# Altium PCB Flyback-Converter_pcb.PcbDoc
Units mm, origin at the board's own origin, x right, y up, seen from the top; angles counter-clockwise.
Board outline 75 x 23 mm, 2 copper layers (Top Layer, Bottom Layer), stack 0.4 mm thick; 16 components, 11 nets, 49 pads, 0 vias.
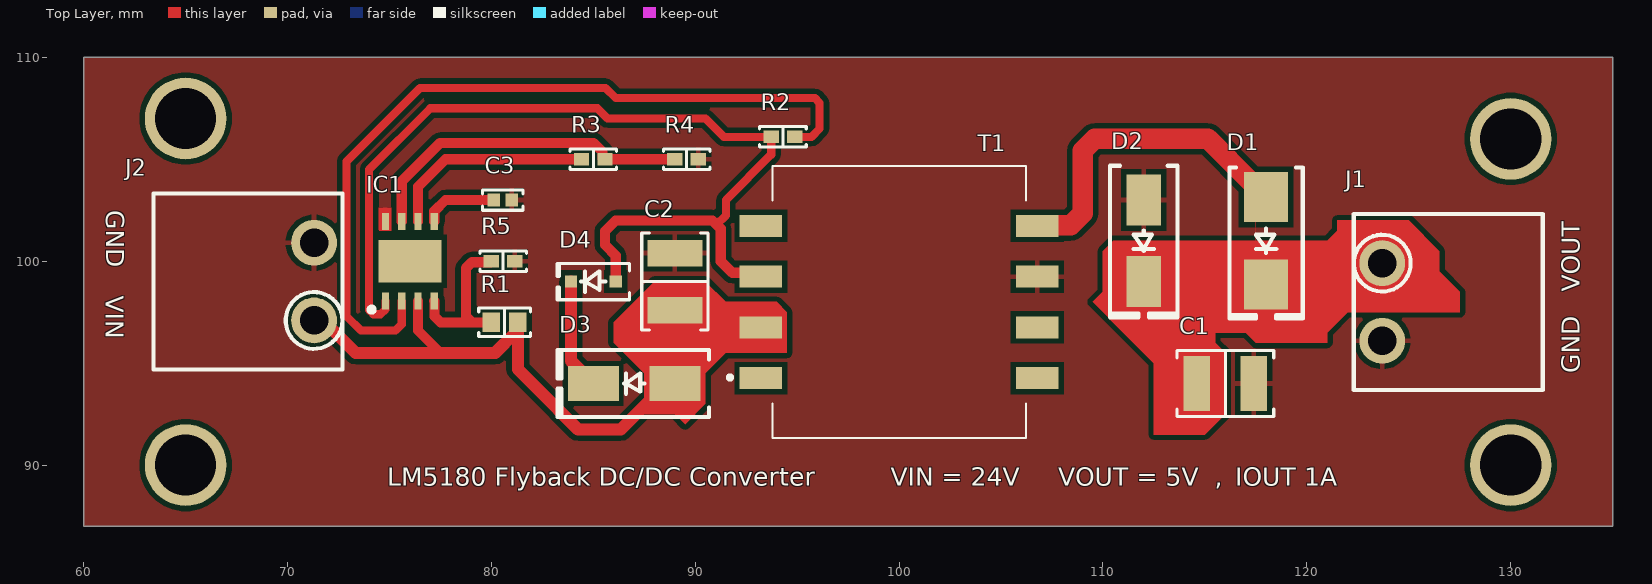
[diagram p0: Top Layer view]
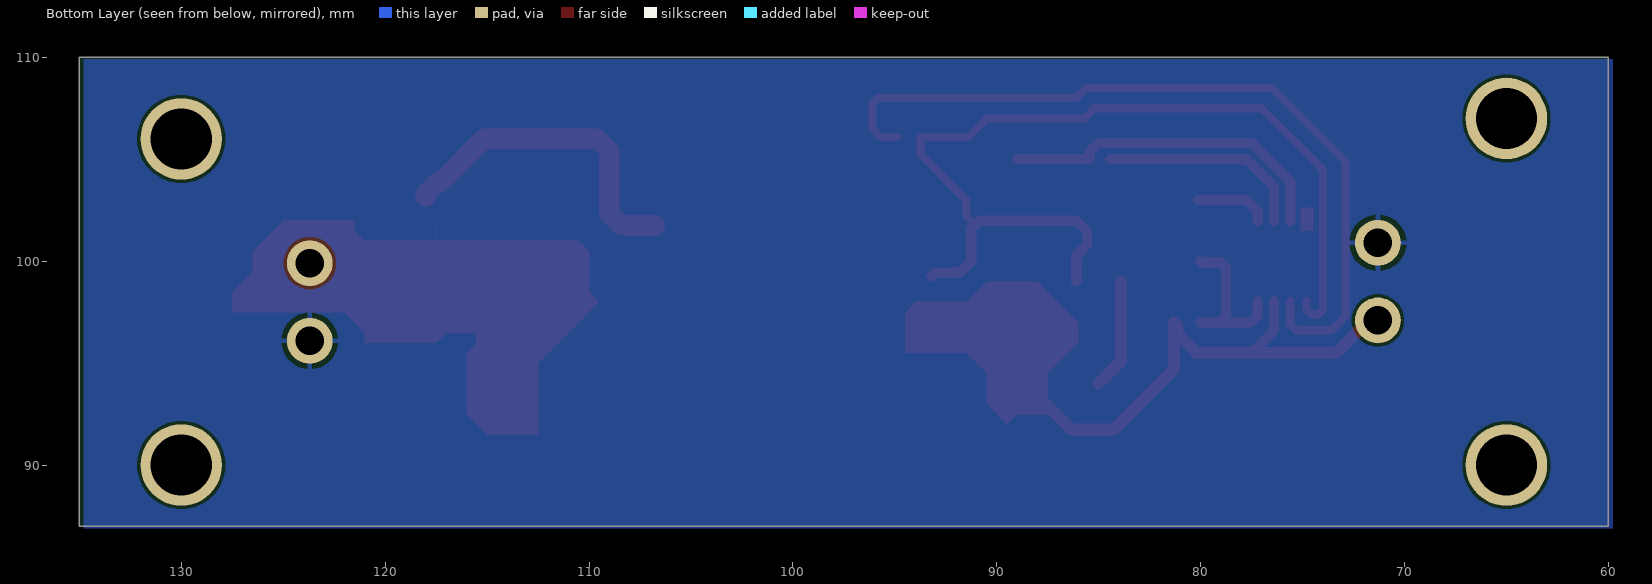
[diagram p1: Bottom Layer view, seen from below]

## Layer stack, top to bottom
Top Solder: solder mask 0.0102, Solder Resist, Dk 3.5
Top Layer: signal copper 0.1
Dielectric 1: dielectric 0.2, FR-4, Dk 4.8
Bottom Layer: signal copper 0.1
Bottom Solder: solder mask 0.0102, Solder Resist, Dk 3.5

## Board outline
60,87 60,110 135,110 135,87

## Design rules (kind name [scope] priority, off if disabled: settings)
Clearance [All] p1: gap=0.152 ignorepadtopadclearanceinfootprint=FALSE
HoleSize [All] p1: absolutevalues=TRUE maxlimit=5 minlimit=0.025 maxpercent=80.000 minpercent=20.000
PolygonConnect [All] p1: connectstyle=Relief reliefconductorwidth=0.254 reliefentries=4 polygonreliefangle="90 Angle" airgapwidth=0.254
RoutingVias [All] p1: holewidth=0.711 width=1.27 viastyle="Through Hole" minholewidth=0.711 minwidth=1.27 maxholewidth=0.711 maxwidth=1.27
SolderMaskExpansion [All] p1: expansion=0.102 istentingtop=FALSE
Width [All] p1: maxlimit=2 minlimit=0.254 preferedwidth=0.254
29 further rules are at their usual default settings.

## Components (designator, comment, footprint, x,y, rotation, side; value= is the part's Value field where it differs from the comment)
C1 "100 µF" "CAP 1210_3225 - 1MM" 116,94 r180 top
C2 "4.7 µF" "CAP 1210_3225 - 1MM" 89,99 r270 top
C3 "47pF" "CAP 0402_1005" 80.56,103 r180 top
D1 "SS24" "DO214AA SMB" 118,101 r270 top
D2 "SMAZ5V6-13-F" "DO214AC SMA" 112,101 r270 top
D3 "SMAZ24-13-F" "DO214AC SMA" 87,94 r180 top
D4 "1N4148WSTR" SOD323F 85,99 r180 top
IC1 "LM5180NGUR" SON80P400X400X80-9N 76,100 r90 top
J1 "OQ0232510000G" "FCI 06-381-2PIN" 127,98 r270 top
J2 "OQ0232510000G" "FCI 06-381-2PIN" 68,99 r90 top
R1 "536 kOhms" "RES 0603_1608" 80.65,97 r0 top
R2 "158 kOhms" "RES 0402_1005" 94.3,106.1 r180 top
R3 "130 kOhms" "RES 0402_1005" 85,105 r0 top
R4 "12.1 kOhms" "RES 0402_1005" 89.575,105 r180 top
R5 "100 kOhms" "RES 0402_1005" 80.575,100 r180 top
T1 "750313974" 750313445 100,98 r0 top

## Footprints (in the part's own frame and the unit in brackets; to place one, negate y for a bottom-side part, rotate by r counter-clockwise, add the part's x,y. Pads: shape width x height; smd on the part's side, far side on the other; paste and mask are expansions set on the pad)
750313445 [mm]
  rect 2.08x1.07 smd: 1(-6.78,-3.735) 2(-6.78,-1.245) 3(-6.78,1.245) 4(-6.78,3.735) 5(6.78,3.735) 6(6.78,1.245) 7(6.78,-1.245) 8(6.78,-3.735)
  silkscreen extent -8.4,-6.67 6.22,6.67, body extent -7.71,-6.67 7.71,6.67, height 11.53
"CAP 0402_1005" [mm] "Chip Capacitor, 2-Leads, Body 1.02x0.51mm, IPC Medium Density"
  rect 0.6x0.64 smd: 1(-0.44,0) 2(0.44,0)
  silkscreen extent -1,-0.5 1,0.5, body extent -0.5,-0.26 0.5,0.26, height 0.52
"CAP 1210_3225 - 1MM" [mm] "Chip Capacitor, 2-Leads, Body 3.20x2.50mm, IPC Medium Density"
  rect 1.3x2.7 smd: 1(-1.4,0) 2(1.4,0)
  silkscreen extent -2.37,-1.63 2.37,1.63, body extent -1.6,-1.25 1.6,1.25, height 1
"DO214AA SMB" [mm] "Molded Diode, 2-Leads, Body 4.31x3.62mm, IPC Medium Density"
  rect 2.45x2.15 smd: 1(-2.15,0) 2(2.15,0)
  silkscreen extent -3.6,-1.8 3.8,1.8, body extent -2.6,-1.8 2.6,1.8, height 2.4
"DO214AC SMA" [mm] "Molded Diode, 2-Leads, Body 4.30x2.60mm, IPC Medium Density"
  rect 2.5x1.7 smd: 1(-2,0) 2(2,0)
  silkscreen extent -3.68,-1.65 3.75,1.65, body extent -2.6,-1.37 2.6,1.37, height 2.4
"FCI 06-381-2PIN" [mm] "FCI Pluggable Terminal Block"
  round 2.25 hole 1.4: 1(-1.905,-3.302) 2(1.905,-3.302)
  silkscreen extent -4.32,-4.7 4.32,4.57, body extent -4.4,-4.7 4.4,4.5, height 7.6
"RES 0402_1005" [mm] "Chip Resistor, 2-Leads, Body 1.0x0.5mm, IPC Medium Density"
  rect 0.75x0.6 smd: 1(-0.575,0) 2(0.575,0)
  silkscreen extent -1.14,-0.51 1.14,0.51, body extent -0.5,-0.25 0.5,0.25, height 0.35
"RES 0603_1608" [mm] "Chip Resistor, 2-Leads, Body 1.60x0.80mm, IPC Medium Density"
  rect 0.85x0.95 smd: 1(-0.65,0) 2(0.65,0)
  silkscreen extent -1.27,-0.7 1.27,0.7, body extent -0.8,-0.4 0.8,0.4, height 0.45
SOD323F [mm] "SODFL, 2-Leads, Body 1.25x2.50mm, IPC Medium Density"
  rect 0.6x0.6 smd: 1(-1.1,0) 2(1.1,0)
  silkscreen extent -1.78,-0.89 1.78,0.89, body extent -1.25,-0.62 1.25,0.63, height 0.8
SON80P400X400X80-9N [mm]
  rect 0.85x0.35 smd: 1(-1.95,1.2) 2(-1.95,0.4) 3(-1.95,-0.4) 4(-1.95,-1.2) 5(1.95,-1.2) 6(1.95,-0.4) 7(1.95,0.4) 8(1.95,1.2)
  rect 2.08x3.1 smd: 9(0,0)
  silkscreen extent -2.5,1.75 -2.25,2, body extent -2,-2 2,2, height 0.77

## Part data
C1: library part GRM32EC70J107ME15L, "CAP CER 100UF 6.3V X7S 1210", Device Package="1210 (3225 Metric)", manufacturer="Murata Electronics", Operating Temperature="-55°C ~ 125°C", Supplier Part Number 1=490-10530-1-ND, Temperature Coefficient=X7S, Tolerance=±20%, Voltage - Rated=6.3V, Applications="General Purpose", Capacitance="100 µF", componentlink1description=Datasheet, componentlink1url=https://search.murata.co.jp/Ceramy/image/img/A01X/G101/ENG/GRM32EC70J107ME15-01.pdf, componentlink2description="DigiKey Link", componentlink2url=https://www.digikey.com/en/products/detail/murata-electronics/GRM32EC70J107ME15L/5027614, lastupdated="5.02.2024 20:41:28", Lifecycle Status=Active, Minimum Order=1, Mounting Type="Surface Mount, MLCC", Package / Case="1210 (3225 Metric)", packaging=TapeAndReel, Part Number=GRM32EC70J107ME15L, Part Status=Active, partid=23659, price=0.15, series=GRM, Size / Dimension="0.126\" L x 0.098\" W (3.20mm x 2.50mm)", Supplier 1=DigiKey, Thickness (Max)="0.106\" (2.70mm)"
C2: library part HMK325BJ475KM-PE, "CAP CER 4.7UF 100V X5R 1210", Device Package="1210 (3225 Metric)", manufacturer="Taiyo Yuden", Operating Temperature="-55°C ~ 85°C", Supplier Part Number 1=587-5034-1-ND, Temperature Coefficient=X5R, Tolerance=±10%, Voltage - Rated=100V, Applications="SMPS Filtering", Capacitance="4.7 µF", componentlink1description=Datasheet, componentlink1url=http://www.yuden.co.jp/productdata/catalog/mlcc06_e.pdf, componentlink2description="DigiKey Link", componentlink2url=https://www.digikey.com/en/products/detail/taiyo-yuden/HMK325BJ475KM-PE/6563627, lastupdated="5.02.2024 20:41:27", Lifecycle Status=Active, Minimum Order=1, Mounting Type="Surface Mount, MLCC", Package / Case="1210 (3225 Metric)", packaging=TapeAndReel, Part Number=HMK325BJ475KM-PE, Part Status=Active, partid=23699, price=0.28, series=M, Size / Dimension="0.126\" L x 0.098\" W (3.20mm x 2.50mm)", Supplier 1=DigiKey, Thickness (Max)="0.106\" (2.70mm)"
C3: library part 04025A470GAT2A, "CAP CER 47PF 50V NP0 0402", Device Package="0402 (1005 Metric)", manufacturer="AVX Corporation", Operating Temperature="-55°C ~ 125°C", Supplier Part Number 1=478-10106-1-ND, Temperature Coefficient="C0G, NP0", Tolerance=±2%, Voltage - Rated=50V, Applications="General Purpose", Capacitance=47pF, componentlink1description=Datasheet, componentlink1url=http://datasheets.avx.com/C0GNP0-Dielectric.pdf, componentlink2description="DigiKey Link", componentlink2url=http://digikey.com/product-detail/en/avx-corporation/04025A470GAT2A/478-10106-1-ND/6797138, lastupdated="8.02.2022 12:26:40", Lifecycle Status=Active, Minimum Order=1, Mounting Type="Surface Mount, MLCC", Package / Case="0402 (1005 Metric)", packaging=TapeAndReel, Part Number=04025A470GAT2A, Part Status=Active, partid=11871, price=0.02, series=-, Size / Dimension="0.039\" L x 0.020\" W (1.00mm x 0.50mm)", Supplier 1=DigiKey, Thickness (Max)="0.022\" (0.56mm)"
D1: "DIODE SCHOTTKY 40V 2A DO214AA", Current - Average Rectified (Io)=2A, Current - Reverse Leakage @ Vr="400µA @ 40V", manufacturer="ON Semiconductor", Operating Temperature - Junction="-65°C ~ 125°C", Package / Case="DO-214AA, SMB", Supplier Device Package="DO-214AA (SMB)", Supplier Part Number 1=SS24FSCT-ND, Voltage - DC Reverse (Vr) (Max)=40V, Voltage - Forward (Vf) (Max) @ If="500mV @ 2A", componentlink1description=Datasheet, componentlink1url=https://www.onsemi.com/pub/Collateral/SS29-D.pdf, componentlink2description="DigiKey Link", componentlink2url=http://digikey.com/product-detail/en/on-semiconductor/SS24/SS24FSCT-ND/1626273, Diode Type=Schottky, lastupdated="5.02.2024 21:25:28", Lifecycle Status=Active, Minimum Order=1, Mounting Type="Surface Mount", packaging=TapeAndReel, Part Number=SS24, Part Status=Active, partid=1394, price=0.10, series=-, Speed="Fast Recovery =< 500ns, > 200mA (Io)", Supplier 1=DigiKey
D2: "DIODE ZENER 5.6V 1W SMA", Current - Reverse Leakage @ Vr="5 µA @ 2 V", manufacturer="Diodes Incorporated", Operating Temperature="-65°C ~ 150°C", Package / Case="DO-214AC, SMA", Power - Max="1 W", Supplier Device Package=SMA, Supplier Part Number 1=SMAZ5V6-FDICT-ND, Tolerance=±5%, Voltage - Forward (Vf) (Max) @ If="1.2 V @ 200 mA", Voltage - Zener (Nom) (Vz)="5.6 V", componentlink1description=Datasheet, componentlink1url=https://www.diodes.com/assets/Datasheets/ds18015.pdf, componentlink2description="DigiKey Link", componentlink2url=https://www.digikey.com/en/products/detail/diodes-incorporated/SMAZ5V6-13-F/755466, lastupdated="5.02.2024 21:26:52", Lifecycle Status=Active, Minimum Order=1, Mounting Type="Surface Mount", packaging=TapeAndReel, Part Number=SMAZ5V6-13-F, Part Status=Active, partid=1514, price=0.07, series=-, Supplier 1=DigiKey, Impedance (Max) (Zzt)="2 Ohms"
D3: "DIODE ZENER 24V 1W SMA", Current - Reverse Leakage @ Vr="500 nA @ 18.2 V", manufacturer="Diodes Incorporated", Operating Temperature="-65°C ~ 150°C", Package / Case="DO-214AC, SMA", Power - Max="1 W", Supplier Device Package=SMA, Supplier Part Number 1=SMAZ24-FDICT-ND, Tolerance=±5%, Voltage - Forward (Vf) (Max) @ If="1.2 V @ 200 mA", Voltage - Zener (Nom) (Vz)="24 V", componentlink1description=Datasheet, componentlink1url=https://www.diodes.com/assets/Datasheets/ds18015.pdf, componentlink2description="DigiKey Link", componentlink2url=https://www.digikey.com/en/products/detail/diodes-incorporated/SMAZ24-13-F/765429, lastupdated="5.02.2024 21:26:52", Lifecycle Status=Active, Minimum Order=1, Mounting Type="Surface Mount", packaging=TapeAndReel, Part Number=SMAZ24-13-F, Part Status=Active, partid=1516, price=0.07, series=-, Supplier 1=DigiKey, Impedance (Max) (Zzt)="15 Ohms"
D4: "DIODE GEN PURP 75V 300MA SOD323", Capacitance @ Vr, F="2pF @ 0V, 1MHz", Current - Average Rectified (Io)="300mA (DC)", Current - Reverse Leakage @ Vr="2.5 µA @ 75 V", manufacturer="SMC Diode Solutions", Operating Temperature - Junction="-65°C ~ 100°C", Package / Case="SC-90, SOD-323F", Supplier Device Package=SOD-323, Supplier Part Number 1=1655-1359-1-ND, Voltage - DC Reverse (Vr) (Max)="75 V", Voltage - Forward (Vf) (Max) @ If="1 V @ 300 mA", componentlink1description=Datasheet, componentlink1url=http://www.smc-diodes.com/propdf/1N4148WS%20N0572%20REV.B.pdf, componentlink2description="DigiKey Link", componentlink2url=https://www.digikey.com/en/products/detail/smc-diode-solutions/1N4148WSTR/6022449, Diode Type=Standard, lastupdated="5.02.2024 21:26:30", Lifecycle Status=Active, Minimum Order=1, Mounting Type="Surface Mount", packaging=TapeAndReel, Part Number=1N4148WSTR, Part Status=Active, partid=1177, price=0.02, Reverse Recovery Time (trr)="4 ns", series=-, Speed="Fast Recovery =< 500ns, > 200mA (Io)", Supplier 1=DigiKey
IC1: "Integrated Circuit", Manufacturer_Name="Texas Instruments", Mouser Part Number=595-LM5180NGUR, Arrow Part Number=LM5180NGUR, Arrow Price/Stock=https://www.arrow.com/en/products/lm5180ngur/texas-instruments?region=nac, Datasheet Link=http://www.ti.com/lit/gpn/LM5180, Height=0.8mm, Manufacturer_Part_Number=LM5180NGUR, Mouser Price/Stock=https://www.mouser.co.uk/ProductDetail/Texas-Instruments/LM5180NGUR?qs=PqoDHHvF64%2Ft041UjBZcnw%3D%3D
J1 J2: "TERM BLOCK HDR 2POS 90DEG 3.81MM", Color=Green, Current - UL=10A, manufacturer="Amphenol Anytek", Operating Temperature="-40°C ~ 115°C", Supplier Part Number 1=609-3819-ND, Voltage - UL=300V, componentlink1description=Datasheet, componentlink1url=http://portal.fciconnect.com/Comergent//fci/drawing/oqxx32x100j0g.pdf, componentlink2description="DigiKey Link", componentlink2url=//digikey.com/product-detail/en/amphenol-anytek/OQ0232510000G/609-3819-ND/2261255, Contact Mating Finish=Tin, Header Orientation="90°, Right Angle", lastupdated="16.12.2019 19:14:30", Lifecycle Status=0, Minimum Order=1, Mounting Type="Through Hole", Number of Levels=1, Number of Positions=2, packaging=Bulk, Part Number=OQ0232510000G, Part Status=Active, Pitch="0.150\" (3.81mm)", Positions Per Level=2, price=0.49, series=06-381, Supplier 1=DigiKey, Termination Style=Solder, Type="Header, Male Pins, Shrouded (4 Side)"
R1: library part CPF0603B536KE1, "RES 536 KOHM 0.1% 1/16W 0603", Device Package="0603 (1608 Metric)", manufacturer="TE Connectivity Passive Product", Operating Temperature="-55°C ~ 155°C", Power (Watts)="0.063W, 1/16W", Supplier Device Package=0603, Supplier Part Number 1=1712-CPF0603B536KE1CT-ND, Temperature Coefficient=±25ppm/°C, Tolerance=±0.1%, componentlink2description="DigiKey Link", componentlink2url=https://www.digikey.com/en/products/detail/te-connectivity-passive-product/CPF0603B536KE1/7493596, Composition="Thin Film", Height - Seated (Max)="0.022\" (0.55mm)", lastupdated="5.02.2024 20:37:55", Lifecycle Status=Active, Minimum Order=1, Number of Terminations=2, Package / Case="0603 (1608 Metric)", packaging=TapeAndReel, Part Number=CPF0603B536KE1, Part Status=Active, partid=75687, price=0.12, Resistance="536 kOhms", series="CPF, Neohm", Size / Dimension="0.061\" L x 0.031\" W (1.55mm x 0.80mm)", Supplier 1=DigiKey
R2: library part AC0402FR-07158KL, "RES SMD 158K OHM 1% 1/16W 0402", Device Package="0402 (1005 Metric)", manufacturer=Yageo, Operating Temperature="-55°C ~ 155°C", Power (Watts)="0.063W, 1/16W", Ratings=AEC-Q200, Supplier Device Package=0402, Supplier Part Number 1=13-AC0402FR-07158KLCT-ND, Temperature Coefficient=±100ppm/°C, Tolerance=±1%, componentlink1description=Datasheet, componentlink1url=https://www.yageo.com/upload/media/product/productsearch/datasheet/rchip/PYu-AC_51_RoHS_L_9.pdf, componentlink2description="DigiKey Link", componentlink2url=https://www.digikey.com/en/products/detail/yageo/AC0402FR-07158KL/5895082, Composition="Thick Film", Features="Automotive AEC-Q200, Moisture Resistant", Height - Seated (Max)="0.015\" (0.37mm)", lastupdated="5.02.2024 20:27:43", Lifecycle Status=Active, Minimum Order=1, Number of Terminations=2, Package / Case="0402 (1005 Metric)", packaging=CutTape, Part Number=AC0402FR-07158KL, Part Status=Active, partid=70450, price=0.01, Resistance="158 kOhms", series=AC, Size / Dimension="0.039\" L x 0.020\" W (1.00mm x 0.50mm)", Supplier 1=DigiKey
R3: library part RT0402FRE07130KL, "RES SMD 130K OHM 1% 1/16W 0402", Device Package="0402 (1005 Metric)", manufacturer=Yageo, Operating Temperature="-55°C ~ 155°C", Power (Watts)="0.063W, 1/16W", Supplier Device Package=0402, Supplier Part Number 1=13-RT0402FRE07130KLCT-ND, Temperature Coefficient=±50ppm/°C, Tolerance=±1%, componentlink1description=Datasheet, componentlink1url=https://media.digikey.com/pdf/Data%20Sheets/Yageo%20PDFs/RT.pdf, componentlink2description="DigiKey Link", componentlink2url=https://www.digikey.com/en/products/detail/yageo/RT0402FRE07130KL/1071746, Composition="Thin Film", Features="Moisture Resistant", Height - Seated (Max)="0.014\" (0.35mm)", lastupdated="5.02.2024 20:27:53", Lifecycle Status=Active, Minimum Order=1, Number of Terminations=2, Package / Case="0402 (1005 Metric)", packaging=TapeAndReel, Part Number=RT0402FRE07130KL, Part Status=Active, partid=65019, price=0.01, Resistance="130 kOhms", series=RT, Size / Dimension="0.039\" L x 0.020\" W (1.00mm x 0.50mm)", Supplier 1=DigiKey
R4: library part RC0402FR-1012K1L, "RES 12.1K OHM 1% 1/16W 0402", Device Package="0402 (1005 Metric)", manufacturer=Yageo, Operating Temperature="-55°C ~ 155°C", Power (Watts)="0.063W, 1/16W", Supplier Device Package=0402, Supplier Part Number 1=13-RC0402FR-1012K1LCT-ND, Temperature Coefficient=±100ppm/°C, Tolerance=±1%, componentlink1description=Datasheet, componentlink1url=https://www.yageo.com/upload/media/product/productsearch/datasheet/rchip/PYu-RC_Group_51_RoHS_L_12.pdf, componentlink2description="DigiKey Link", componentlink2url=https://www.digikey.com/en/products/detail/yageo/RC0402FR-1012K1L/17020868, Composition="Thick Film", Features="Moisture Resistant", Height - Seated (Max)="0.016\" (0.40mm)", lastupdated="5.02.2024 20:27:23", Lifecycle Status=Active, Minimum Order=1, Number of Terminations=2, Package / Case="0402 (1005 Metric)", packaging=CutTape, Part Number=RC0402FR-1012K1L, partid=83592, price=0.01, Resistance="12.1 kOhms", series=RC_L, Size / Dimension="0.039\" L x 0.020\" W (1.00mm x 0.50mm)", Supplier 1=DigiKey
R5: library part CRCW0402100KJNEDIF, "RES SMD 100K OHM 5% 1/16W 0402", Device Package="0402 (1005 Metric)", manufacturer="Vishay Dale", Operating Temperature="-55°C ~ 155°C", Power (Watts)="0.063W, 1/16W", Ratings=AEC-Q200, Supplier Device Package=0402, Supplier Part Number 1=541-100KATCT-ND, Temperature Coefficient=±200ppm/°C, Tolerance=±5%, componentlink1description=Datasheet, componentlink1url=https://www.vishay.com/docs/20024/dcrcwife3.pdf, componentlink2description="DigiKey Link", componentlink2url=https://www.digikey.com/en/products/detail/vishay-dale/CRCW0402100KJNEDIF/3477259, Composition="Thick Film", Features="Automotive AEC-Q200, Pulse Withstanding", Height - Seated (Max)="0.016\" (0.40mm)", lastupdated="5.02.2024 20:27:27", Lifecycle Status=Active, Minimum Order=1, Number of Terminations=2, Package / Case="0402 (1005 Metric)", packaging=TapeAndReel, Part Number=CRCW0402100KJNEDIF, partid=81823, price=0.04, Resistance="100 kOhms", series=CRCW-IF, Size / Dimension="0.039\" L x 0.020\" W (1.00mm x 0.50mm)", Supplier 1=DigiKey
T1: "Transformer", Manufacturer_Name="Wurth Elektronik", Mouser Part Number=710-750313974, Datasheet Link=https://katalog.we-online.de/ctm/datasheet/750313974.pdf, Height=11.43mm, Manufacturer_Part_Number=750313974, Mouser Price/Stock=https://www.mouser.co.uk/ProductDetail/Wurth-Elektronik/750313974?qs=x30FU183Eu532zXeh%2Fnknw%3D%3D

## Free pads (board coordinates)
  round 4 hole 3: ""(65,90) ""(65,107) ""(130,90) ""(130,106)

## Nets (pads, with @x,y where several pads share a name; then routed paths per layer and width w, separated by ;. In a path a pad name is that pad's centre, name@x,y a point inside that pad or via, vN(x,y) a via of type N, cw(c..) or ccw(c..) an arc to the next point about the centre after c; other vN are vias at no path point)
GND: C1.1 C2.1 C3.1 D2.1 IC1.8 J1.2 J2.2 R4.1 R5.1 T1.6
NetC1_2: C1.2 D1.2 D2.2 J1.1
NetC2_2: C2.2 D3.1 IC1.3 J2.1 R1.2 T1.2 | length 26.7
  Top Layer w0.5: IC1.3 76.4,96.6 77.5,95.5
  Top Layer w0.6: J2.1 71.748,97.095 73.343,95.5 77.5,95.5 80.183,95.5 81.175,96.492 81.175,96.875 R1.2 81.3,94.7 82.25,93.75 84.25,91.75 86.35,91.75 88.6,94 D3.1
NetC3_2: C3.2 IC1.5 | length 3.6
  Top Layer w0.5: IC1.5 77.2,102.45 77.75,103 C3.2
NetD1_1: D1.1 T1.5 | length 16
  Top Layer w1: T1.5 106.815,101.77 108.414,101.77 109,102.356 109,105.414 109.586,106 115.15,106 117.275,103.875 117.425,103.875 118,103.3 D1.1
NetD3_2: D3.2 D4.2 | length 5.5
  Top Layer w0.6: D4.2 83.9,95.1 D3.2
NetD4_1: D4.1 IC1.1 R2.2 T1.3 | length 47.9
  Top Layer w0.4: IC1.1 74.8,97.634 74.566,97.4 74.208,97.4 73.996,97.612 73.996,101.228 74,101.232 74,104.5 77,107.5 85.2,107.5 85.7,107 90.5,107 91.4,106.1 R2.2 93.725,105.225 91.5,103 91.5,102.25 91.045,101.795
  Top Layer w0.5: D4.1 86.1,100.275 85.575,100.8 85.575,101.475 86.1,102 90.84,102 91.045,101.795 91.25,101.59 91.25,100 91.501,99.749 91.82,99.43 93.035,99.43 T1.3
NetR1_1: IC1.4 R1.1 R5.2 | length 7.8
  Top Layer w0.5: IC1.4 77.207,98.043 77.207,97.293 77.5,97 79.043,97 ; R1.1 79.043,97 ; R5.2 79.95,99.95 79.043,99.95 78.75,99.657 78.75,97.293 79.043,97
NetR2_1: IC1.2 R2.1 | length 39.5
  Top Layer w0.4: IC1.2 75.6,96.9 75.3,96.6 73.6,96.6 72.9,97.3 72.9,104.9 76.5,108.5 85.6,108.5 86.1,108 95.866,108 96.1,107.766 96.1,106.5 95.7,106.1 R2.1
NetR3_1: IC1.6 R3.1 | length 10.3
  Top Layer w0.5: IC1.6 76.4,103.65 77.75,105 R3.1
NetR3_2: IC1.7 R3.2 R4.2 | length 16.7
  Top Layer w0.5: IC1.7 75.6,103.916 77.488,105.804 85.009,105.804 85.45,105.363 85.45,105.05 85.5,105 R4.2
pads on no net: IC1.9 T1.1 T1.4 T1.7 T1.8

## Polygon pours and split planes (outlines as drawn)
GND on Top Layer "GND" (solid, pour order 0): 60,110 135,110 135,87 60,87
GND on Bottom Layer "GND" (solid, pour order 4): 59.789,109.9 134.789,109.9 134.789,86.9 59.789,86.9

## Other copper
Top Layer:
  region net GND: 74.5,101.5 75.086,101.5 75.086,102.629 74.463,102.629 74.463,101.537
  region net NetC1_2: 116,92.5 115,91.5 112.5,91.5 112.5,95 111,96.5 111.5,97 115.5,97 115.5,96 116,95.5
  region net NetC1_2: 126.5,100.5 125,102 123,102 124.5,100.5
  region net NetC1_2: 124,101 123,102 121.5,102 121.5,101.5 121,101
  region: 117.5,101 117.5,102
  region net NetC1_2: 124.5,101 125,100.5 126.5,100.5 126.5,99.5 127.5,98.5 127.5,97.5 122,97.5 121,96.5 121,96 117.5,96 117,96.5 111,96.5 109.5,98 110,98.5 110,100.5 110.5,101
  region net NetC2_2: 94.5,95.5 91.5,95.5 90.5,94.5 90.5,93 89.5,92 89,92.5 87.5,92.5 87.5,94.5 86,96 86,97 88,99 90.5,99 91.5,98 94,98 94.5,97.5

## Silkscreen, mask and mechanical layers (free items; w line width, h text height)
Top Overlay:
  text "GND" at 60.818,102.5 h1.52 r270
  text "VOUT" at 133.682,98.5 h1.52 r90
  text "VIN" at 60.8,98.3 h1.52 r270
  text "GND" at 133.682,94.5 h1.52 r90
  text "LM5180 Flyback DC/DC Converter" at 74.9,88.688 h1.52
  text "VIN = 24V" at 99.6,88.7 h1.52
  text "VOUT = 5V  ," at 107.8,88.688 h1.52
  text "IOUT 1A" at 116.5,88.688 h1.52
Mechanical 13:
  the board outline again, w0.2